# Altium PCB PCB_PBFL.PcbDoc
Units mil, origin at the board's own origin, x right, y up, seen from the top; angles counter-clockwise.
Board outline 3425 x 2040 mil, 2 copper layers (Top Layer, Bottom Layer); 26 components, 13 nets, 84 pads, 2 vias.
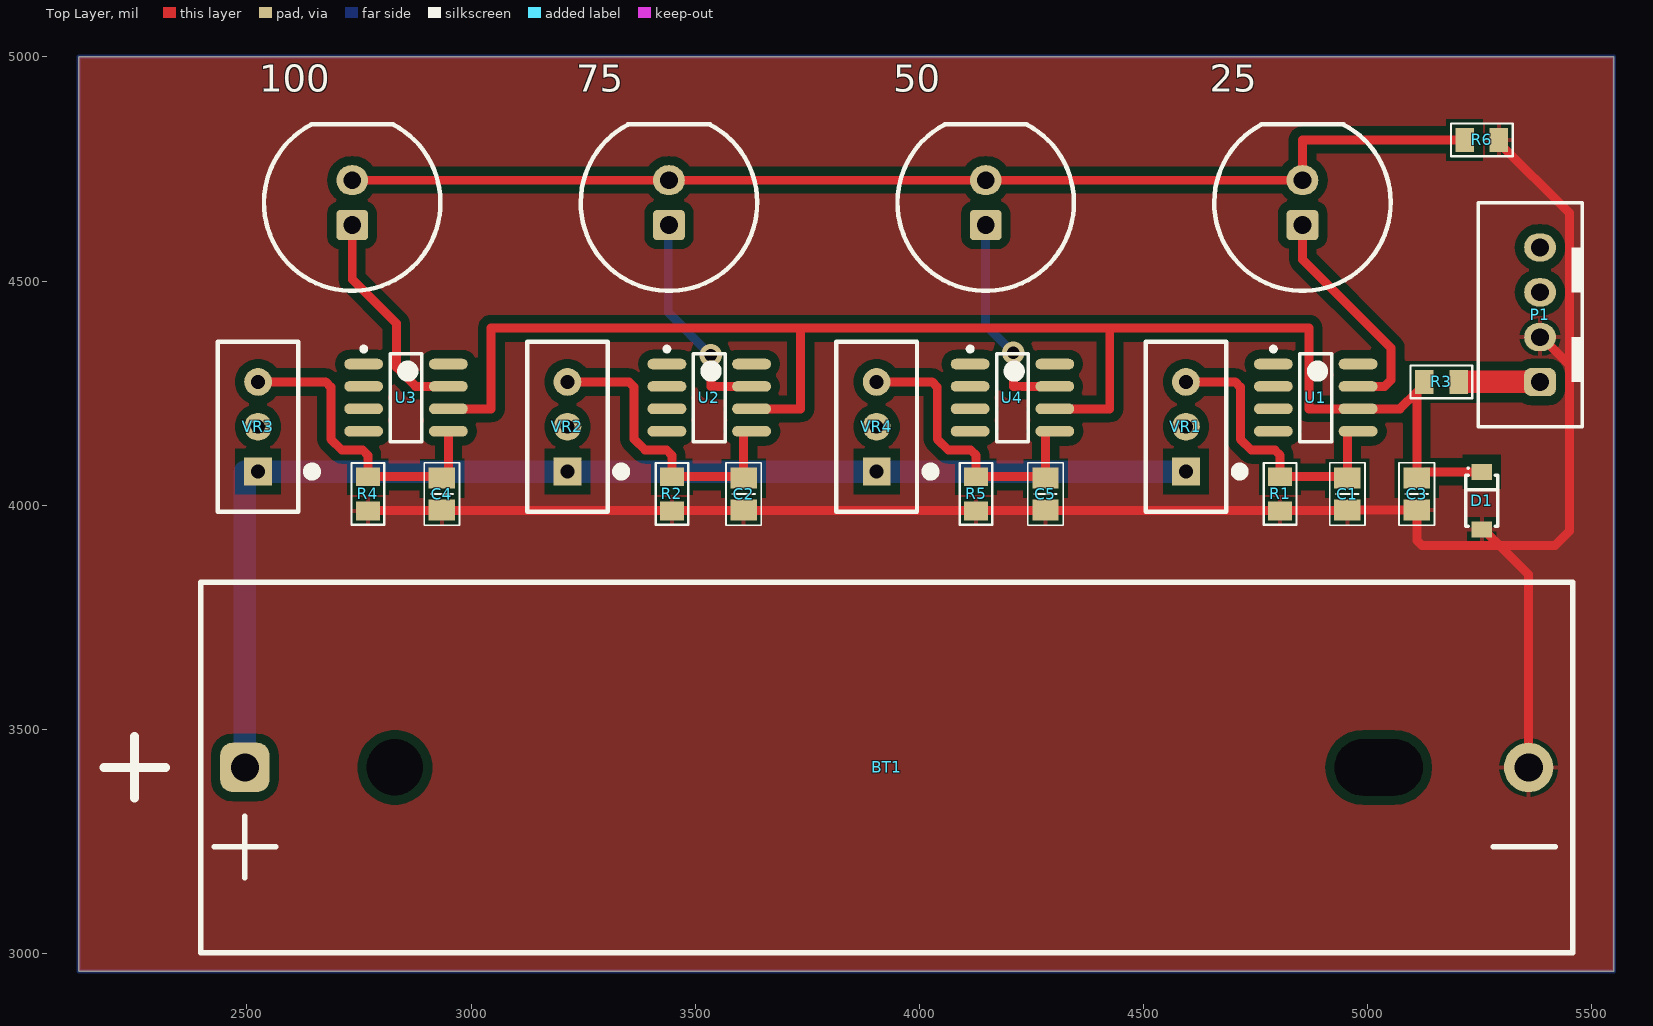
[diagram p0: Top Layer view]
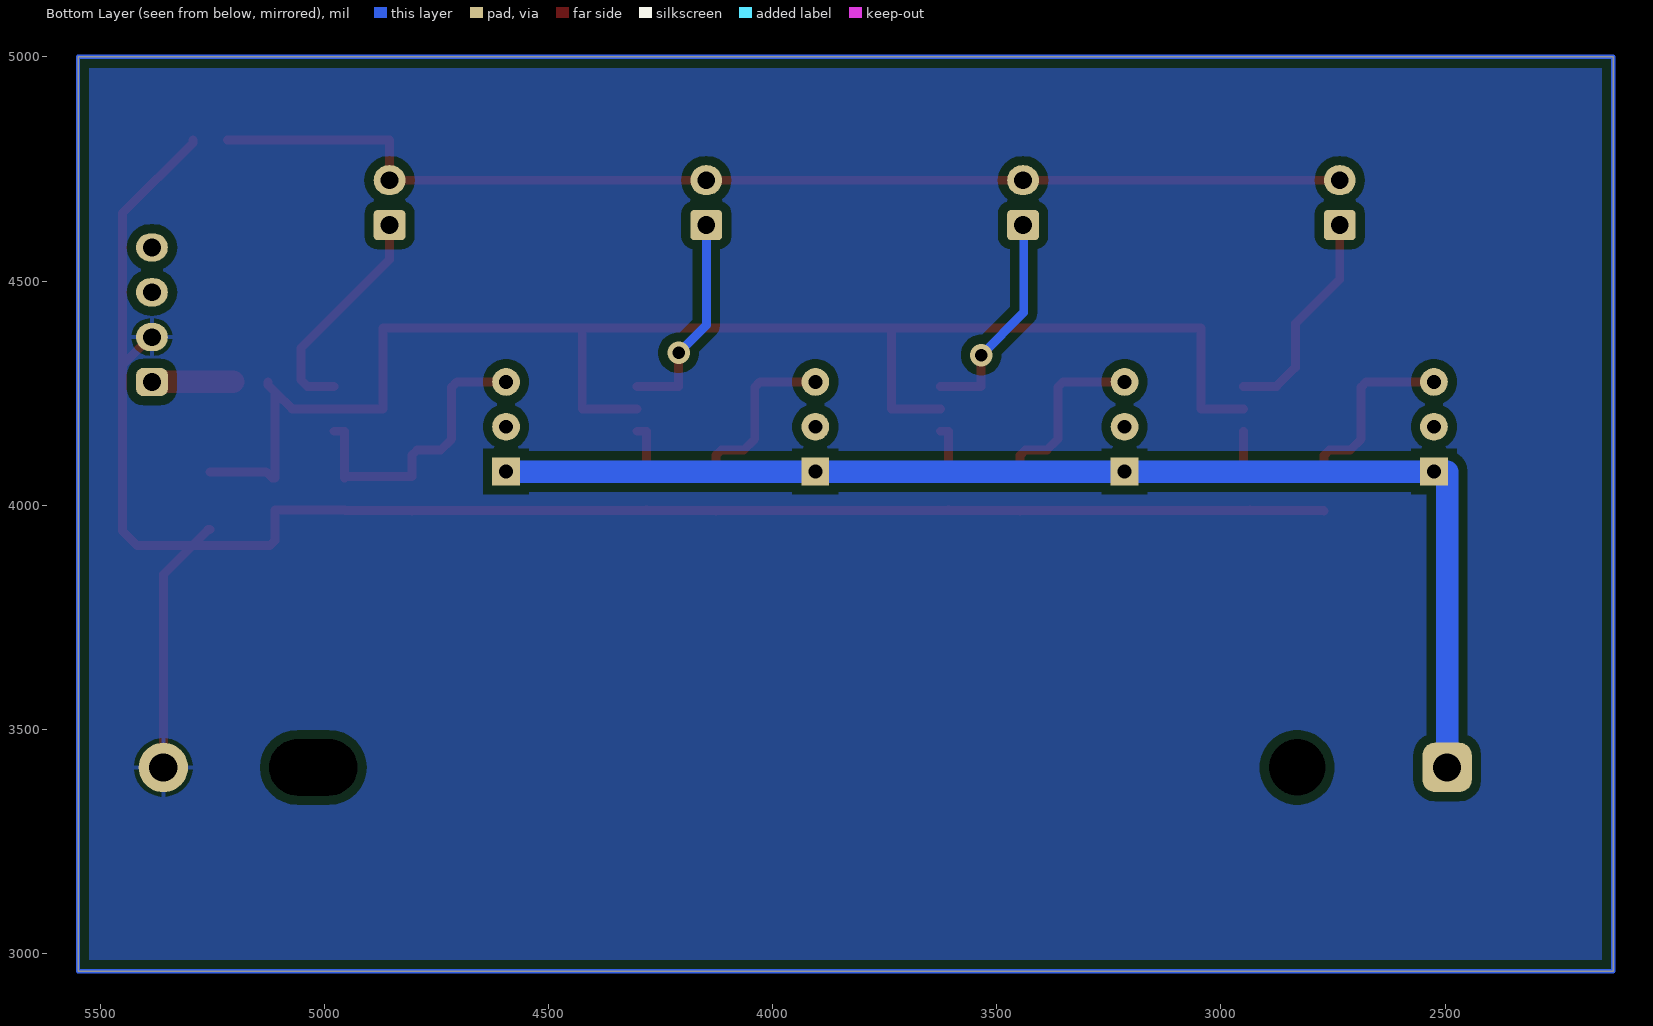
[diagram p1: Bottom Layer view, seen from below]
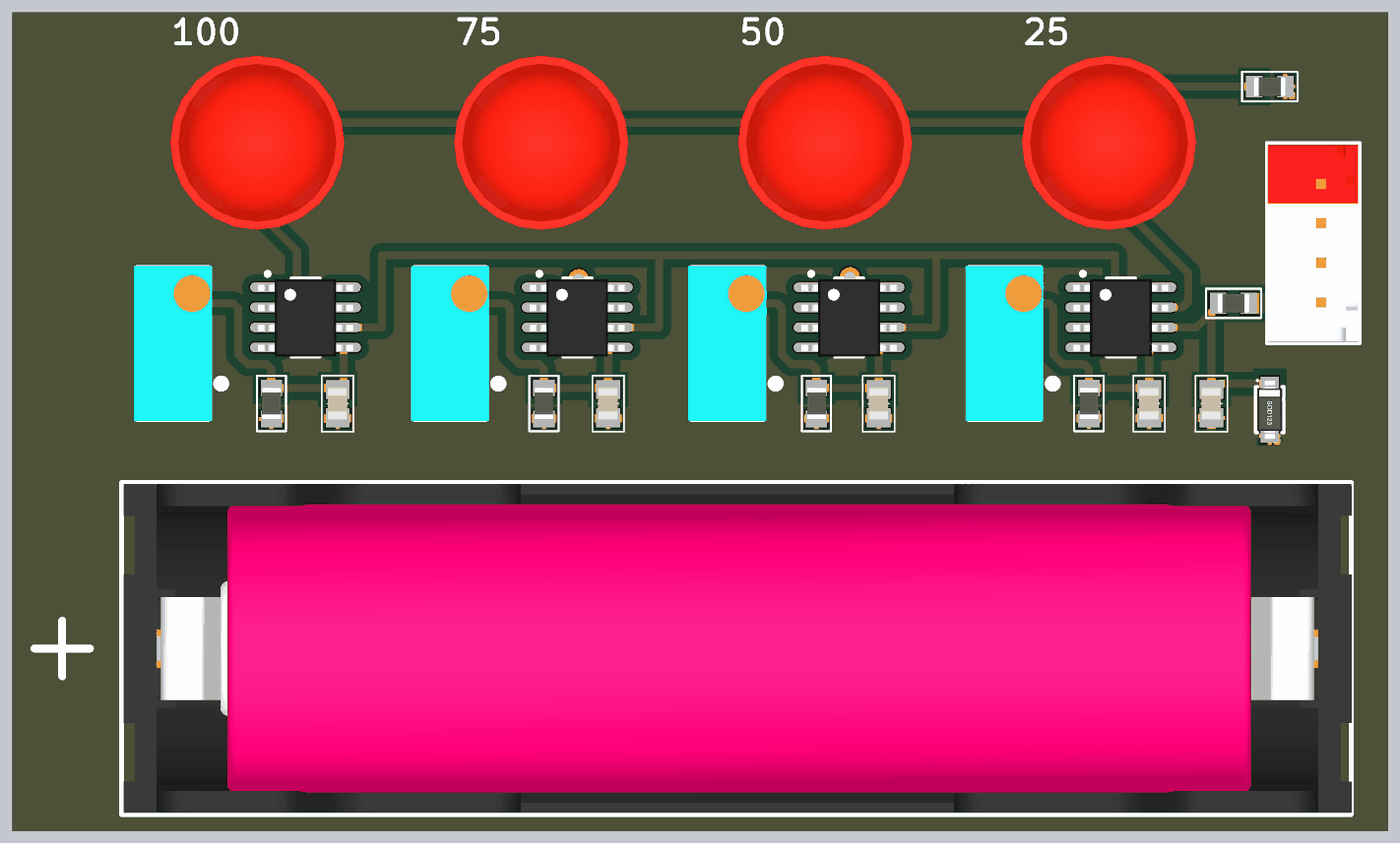
[diagram p2: 3D render of the assembled board from above, using the file's embedded part models]

## Layer stack, top to bottom
Top Solder: solder mask 0.4, Solder Resist, Dk 3.5
Top Layer: signal copper 1.4
Dielectric 1: dielectric 12.6, FR-4, Dk 4.8
Bottom Layer: signal copper 1.4
Bottom Solder: solder mask 0.4, Solder Resist, Dk 3.5

## Board outline
2125,2960 2125,5000 5550,5000 5550,2960

## Design rules (kind name [scope] priority, off if disabled: settings)
Clearance [All] p1: gap=20 ignorepadtopadclearanceinfootprint=FALSE
PolygonConnect [All] p1: connectstyle=Relief reliefconductorwidth=10 reliefentries=4 polygonreliefangle="90 Angle" airgapwidth=10
RoutingVias [All] p1: holewidth=28 width=50 viastyle="Through Hole" minholewidth=28 minwidth=50 maxholewidth=28 maxwidth=50
SolderMaskExpansion [All] p1: expansion=4 istentingtop=FALSE
Width [All] p1: maxlimit=100 minlimit=10 preferedwidth=20
30 further rules are at their usual default settings.

## Components (designator, comment, footprint, x,y, rotation, side; value= is the part's Value field where it differs from the comment)
25 "LED RED" "LED 10MM - RED" 4855,4675 r90 top
50 "LED RED" "LED 10MM - RED" 4148.33,4675 r90 top
75 "LED RED" "LED 10MM - RED" 3441.67,4675 r90 top
100 "LED RED" "LED 10MM - RED" 2735,4675 r90 top
BT1 "Battery" BB-BAT-18650-x1 3922.64,3415 r180 top
C1 "103" "C 0805" 4955,4025 r270 top
C2 "103" "C 0805" 3608.33,4025 r270 top
C3 "104" "C 0805" 5110,4025 r270 top
C4 "103" "C 0805" 2935,4025 r270 top
C5 "103" "C 0805" 4281.67,4025 r270 top
D1 "2V" SOD123 5255,4010 r90 top
P1 "Header 4" HDR/Header/4/BOX/RED 5385,4425 r90 top
R1 "1K" "R 0805" 4805,4025.45 r90 top
R2 "1K" "R 0805" 3448.33,4025.45 r90 top
R3 "2.2K" "R 0805" 5165,4275 r180 top
R4 "1K" "R 0805" 2770,4025.45 r90 top
R5 "1K" "R 0805" 4126.67,4025.45 r90 top
R6 "35" "R 0805" 5255,4815 r0 top
U1 "LM358" SOIC-8 4884.49,4240 r0 top
U2 "LM358" SOIC-8 3531.5,4240 r0 top
U3 "LM358" SOIC-8 2855,4240 r0 top
U4 "LM358" SOIC-8 4207.99,4240 r0 top
VR1 "20K" "R VAR E" 4595,4075 r90 top
VR2 "20K" "R VAR E" 3215,4075 r90 top
VR3 "20K" "R VAR E" 2525,4075 r90 top
VR4 "20K" "R VAR E" 3905,4075 r90 top

## Footprints (in the part's own frame and the unit in brackets; to place one, negate y for a bottom-side part, rotate by r counter-clockwise, add the part's x,y. Pads: shape width x height; smd on the part's side, far side on the other; paste and mask are expansions set on the pad)
BB-BAT-18650-x1 [mm]
  rrect50% 2.8x2.8 hole 1.6: 1(36.25,0)
  round 2.8 hole 1.6: 2(-36.5,0)
  round 0 hole 3.2 slot 5 at 0 deg unplated: HOLE(-28,0)
  round 0 hole 3.2 unplated: HOLE(27.75,0)
  silkscreen extent -39,-10.5 44.25,10.5, body extent -39.01,-10.4 38.64,10.4, height 24.37
"C 0805" [mm] "Chip Capacitor, 2-Leads, Body 2.0x1.3mm, IPC Medium Density"
  rect 1.2x1.5 smd: 1(-0.9,0) 2(0.9,0)
  silkscreen extent -1.78,-1 1.78,1, body extent -1,-0.64 1,0.61, height 0.6
HDR/Header/4/BOX/RED [mm]
  rrect50% 1.6x1.8 hole 1: 1(-3.81,0)
  oval 1.6x1.8 hole 1: 2(-1.27,0) 3(1.27,0) 4(3.81,0)
  silkscreen extent -6.35,-2.41 6.35,3.5, body extent -6.2,-2.3 6.2,3.45, height 7
"LED 10MM - RED" [mm]
  rrect25% 1.7x1.8 hole 1: 1(-1.27,0)
  oval 1.7x1.8 hole 1: 2(1.27,0)
  silkscreen extent -5,-5 4.44,5, body extent -5.5,-5.5 5.5,5.5, height 14.15
"R 0805" [mm] "Chip Resistor, 2-Leads, Body 2.0x1.3mm, IPC Medium Density"
  rect 1.05x1.35 smd: 1(-0.975,0) 2(0.975,0)
  silkscreen extent -1.75,-0.92 1.75,0.92, body extent -1,-0.61 1,0.59, height 0.5
"R VAR E" [mil]
  rect 62x62 hole 31: 1(0,0)
  round 62 hole 31: 2(100,0) 3(200,0)
  silkscreen extent -90,-130 290,90, body extent -93,-97 293,97, height 459
SOD123 [mm] "Molded Diode, 2-Leads, Body 2.7x1.6mm, IPC Medium Density"
  rect 0.91x1.143 smd: 1(-1.64,0) 2(1.64,0)
  silkscreen extent -1.45,-0.9 1.9,0.9, body extent -1.85,-0.78 1.85,0.77, height 1.35
SOIC-8 [mm] "SOIC, 8-Leads, Body 5.0x4.0mm (max), Pitch 1.27mm, IPC Medium Density"
  oval 2.2x0.6 smd: 1(-2.4,1.905) 2(-2.4,0.635) 3(-2.4,-0.635) 4(-2.4,-1.905) 5(2.4,-1.905) 6(2.4,-0.635) 7(2.4,0.635) 8(2.4,1.905)
  silkscreen extent -2.52,-2.5 0.9,2.88, body extent -3,-2.49 3,2.41, height 1.75

## Part data
25 50 75 100: "Typical LED 3-pin 2-color"
C1 C2 C3 C4 C5: library part "Capacitor NP", "Capacitor non-pol"
D1: library part "Diode Zener", "Zener Diode"
P1: "Header, 4-Pin"
R1 R2 R3 R4 R5 R6: library part Resistor, "Resistor"
U1 U2 U3 U4: "Low Power Dual Operational Amplifiers"
VR1 VR2 VR3 VR4: library part "Resistor Variable", "Resistor Variable"

## Via types
v1: diameter 50, hole 28, Top Layer to Bottom Layer, 2 vias

## Nets (pads, with @x,y where several pads share a name; then routed paths per layer and width w, separated by ;. In a path a pad name is that pad's centre, name@x,y a point inside that pad or via, vN(x,y) a via of type N, cw(c..) or ccw(c..) an arc to the next point about the centre after c; other vN are vias at no path point)
BAT: BT1.1 VR1.1 VR2.1 VR3.1 VR4.1 | length 2759.5
  Bottom Layer w50: BT1.1 2495.47,4075 VR3.1 VR2.1 VR4.1 VR1.1
COMPAR: C3.1 D1.2 R3.2 U1.6 U2.6 U3.6 U4.6 | length 3499.9
  Top Layer w20: U3.6 3045,4215 3045,4395 3735,4395 ; U2.6 3735,4215 3735,4395 ; U4.6 4425,4215 4425,4395 ; R3.2 5126.61,4269.09 R3.2@5110,4252.48 ; D1.2 5130.04,4074.57 5115.91,4060.43 C3.1 R3.2@5110,4252.48 ; 3735,4395 4425,4395 ; 4425,4395 4870,4395 4870,4215 U1.6 5072.52,4215 R3.2@5110,4252.48
GND: BT1.2 C1.2 C2.2 C3.2 C4.2 C5.2 D1.1 P1.2 R1.1 R2.1 R4.1 R5.1 R6.2 | length 4384.1
  Top Layer w20: R4.1@2770,3986.61 2771.48,3988.09 2933.52,3988.09 C4.2 2936.48,3988.09 R2.1@3446.86,3988.09 ; R2.1 3447.88,3987.07 R2.1@3446.86,3988.09 ; D1.1 5259.59,3945.43 5295.02,3910 ; R6.2 5293.39,4809.09 5450.43,4652.05 5450.43,4313.5 ; BT1.2 5359.65,3415.35 5355,3420 5359.65,3424.65 5359.65,3845.37 5295.02,3910 ; P1.2 5388.94,4375 5450.43,4313.5 ; R2.1@3446.86,3988.09 3447.08,3988.32 3607.08,3988.32 C2.2 3609.58,3988.32 4125.42,3988.32 R5.1 4127.92,3988.32 4280.42,3988.32 C5.2 4282.92,3988.32 4803.75,3988.32 R1.1 4806.25,3988.32 4953.75,3988.32 C1.2 C3.2 5110,3921.72 5121.72,3910 5295.02,3910 ; 5295.02,3910 5418.28,3910 5450.43,3942.15 5450.43,4313.5
LEDOUT: 25.2 50.2 75.2 100.2 R6.1 | length 2571.6
  Top Layer w20: 100.2 75.2 50.2 25.2 4855,4815 R6.1
Net25_1: 25.1 U1.7 | length 506.8
  Top Layer w20: 25.1 4855,4548.25 5052.28,4350.97 5052.28,4279 5038.28,4265 U1.7
Net50_1: 50.1 U4.7 | length 479.2
  Top Layer w20: 50.1 50.1@4149.17,4624.17 ; v1(4210,4340) 4210,4265 U4.7
  Bottom Layer w20: 50.1 4148.33,4401.67 v1(4210,4340)
Net75_1: 75.1 U2.7 | length 491
  Top Layer w20: v1(3535,4335) 3535,4265 U2.7
  Bottom Layer w20: 75.1 3440,4623.33 3440,4430 v1(3535,4335)
Net100_1: 100.1 U3.7 | length 491.8
  Top Layer w20: 100.1 2735,4503.86 2833.82,4405.04 2833.82,4307.36 2876.18,4265 U3.7
NetC1_1: C1.1 R1.2 U1.5 VR1.3 | length 671.6
  Top Layer w20: VR1.3 4704.98,4275 4716.69,4263.28 4716.69,4147.68 4741.19,4123.19 4793.28,4123.19 4805,4111.47 R1.2 C1.1@4955,4063.84 ; C1.1 C1.1@4955,4063.84 ; U1.5 4955,4165 C1.1@4955,4063.84
NetC2_1: C2.1 R2.2 U2.5 VR2.3 | length 698.6
  Top Layer w20: VR2.3 3351.98,4275 3363.7,4263.28 3363.7,4147.68 3388.19,4123.19 3436.62,4123.19 3448.33,4111.47 R2.2 C2.1@3608.33,4063.84 ; C2.1 C2.1@3608.33,4063.84 ; U2.5 3608.33,4165 C2.1@3608.33,4063.84
NetC4_1: C4.1 R4.2 U3.5 VR3.3 | length 715.5
  Top Layer w20: VR3.3 2675.49,4275 2687.2,4263.28 2687.2,4147.68 2711.7,4123.19 2758.28,4123.19 2770,4111.47 R4.2 2935,4063.84 C4.1 2949.49,4060.43 U3.5
NetC5_1: C5.1 R5.2 U4.5 VR4.3 | length 685.1
  Top Layer w20: VR4.3 4028.48,4275 4040.2,4263.28 4040.2,4147.68 4064.69,4123.19 4114.95,4123.19 4126.67,4111.47 R5.2 C5.1@4281.67,4063.84 ; C5.1 C5.1@4281.67,4063.84 ; U4.5 4281.67,4165 C5.1@4281.67,4063.84
VCC: P1.1 R3.1 | length 181.6
  Top Layer w50: R3.1 P1.1
pads on no net: BT1.HOLE P1.3 P1.4 U1.1 U1.2 U1.3 U1.4 U1.8 U2.1 U2.2 U2.3 U2.4 U2.8 U3.1 U3.2 U3.3 U3.4 U3.8 U4.1 U4.2 U4.3 U4.4 U4.8 VR1.2 VR2.2 VR3.2 VR4.2
copper on no net: | length 10930
  Bottom Layer w10: 2125,2960 5550,2960 5550,5000 2125,5000 2125,2960

## Polygon pours and split planes (outlines as drawn)
GND on Bottom Layer "GND_L02_P000" (solid, pour order 0): 2125,5000 5550,5000 5550,2960 2125,2960
GND on Top Layer "GND_L01_P001" (solid, pour order 1): 2123.19,5002.19 2123.19,2961.81 2125,2960 5550,2960 5550,5000